# Altium PCB PCB1.PcbDoc
Units mil, origin at the board's own origin, x right, y up, seen from the top; angles counter-clockwise.
Board outline 1653.54 x 1141.73 mil, 2 copper layers (Top Layer, Bottom Layer); 7 components, 7 nets, 58 pads, 80 vias.
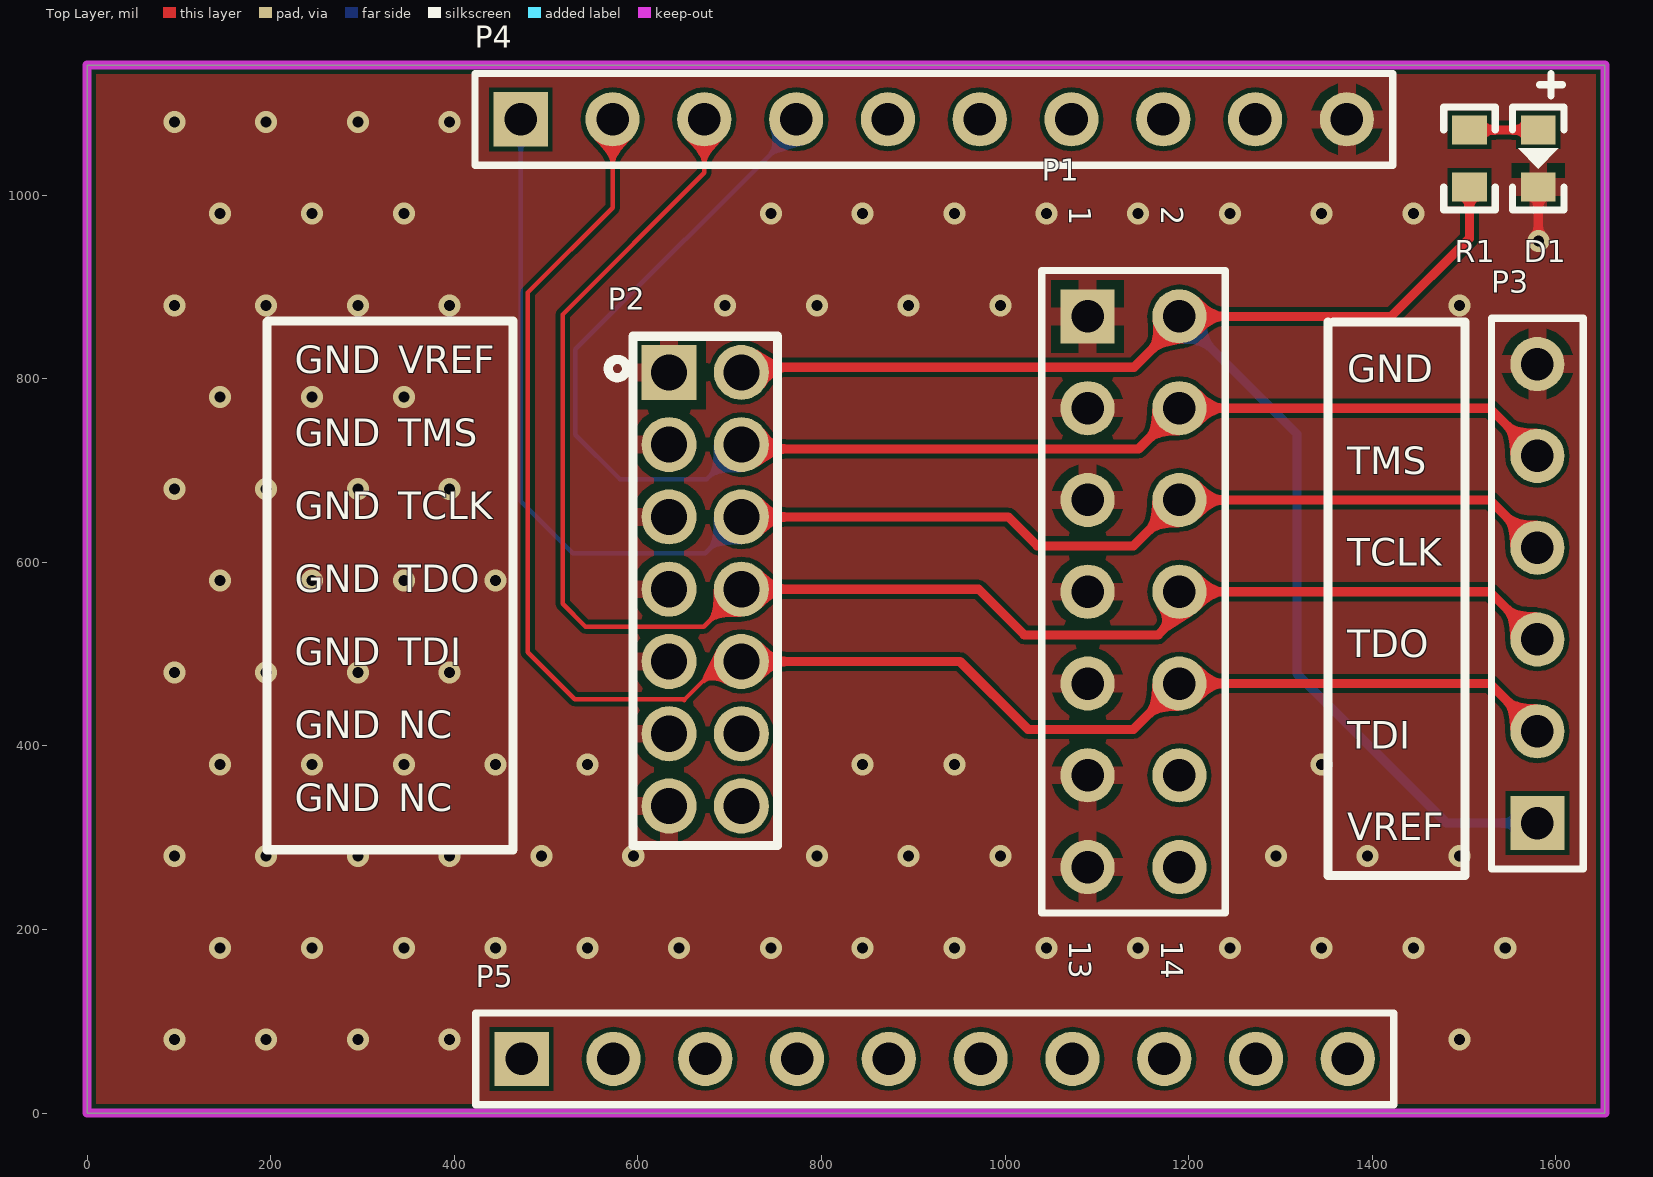
[diagram p0: Top Layer view]
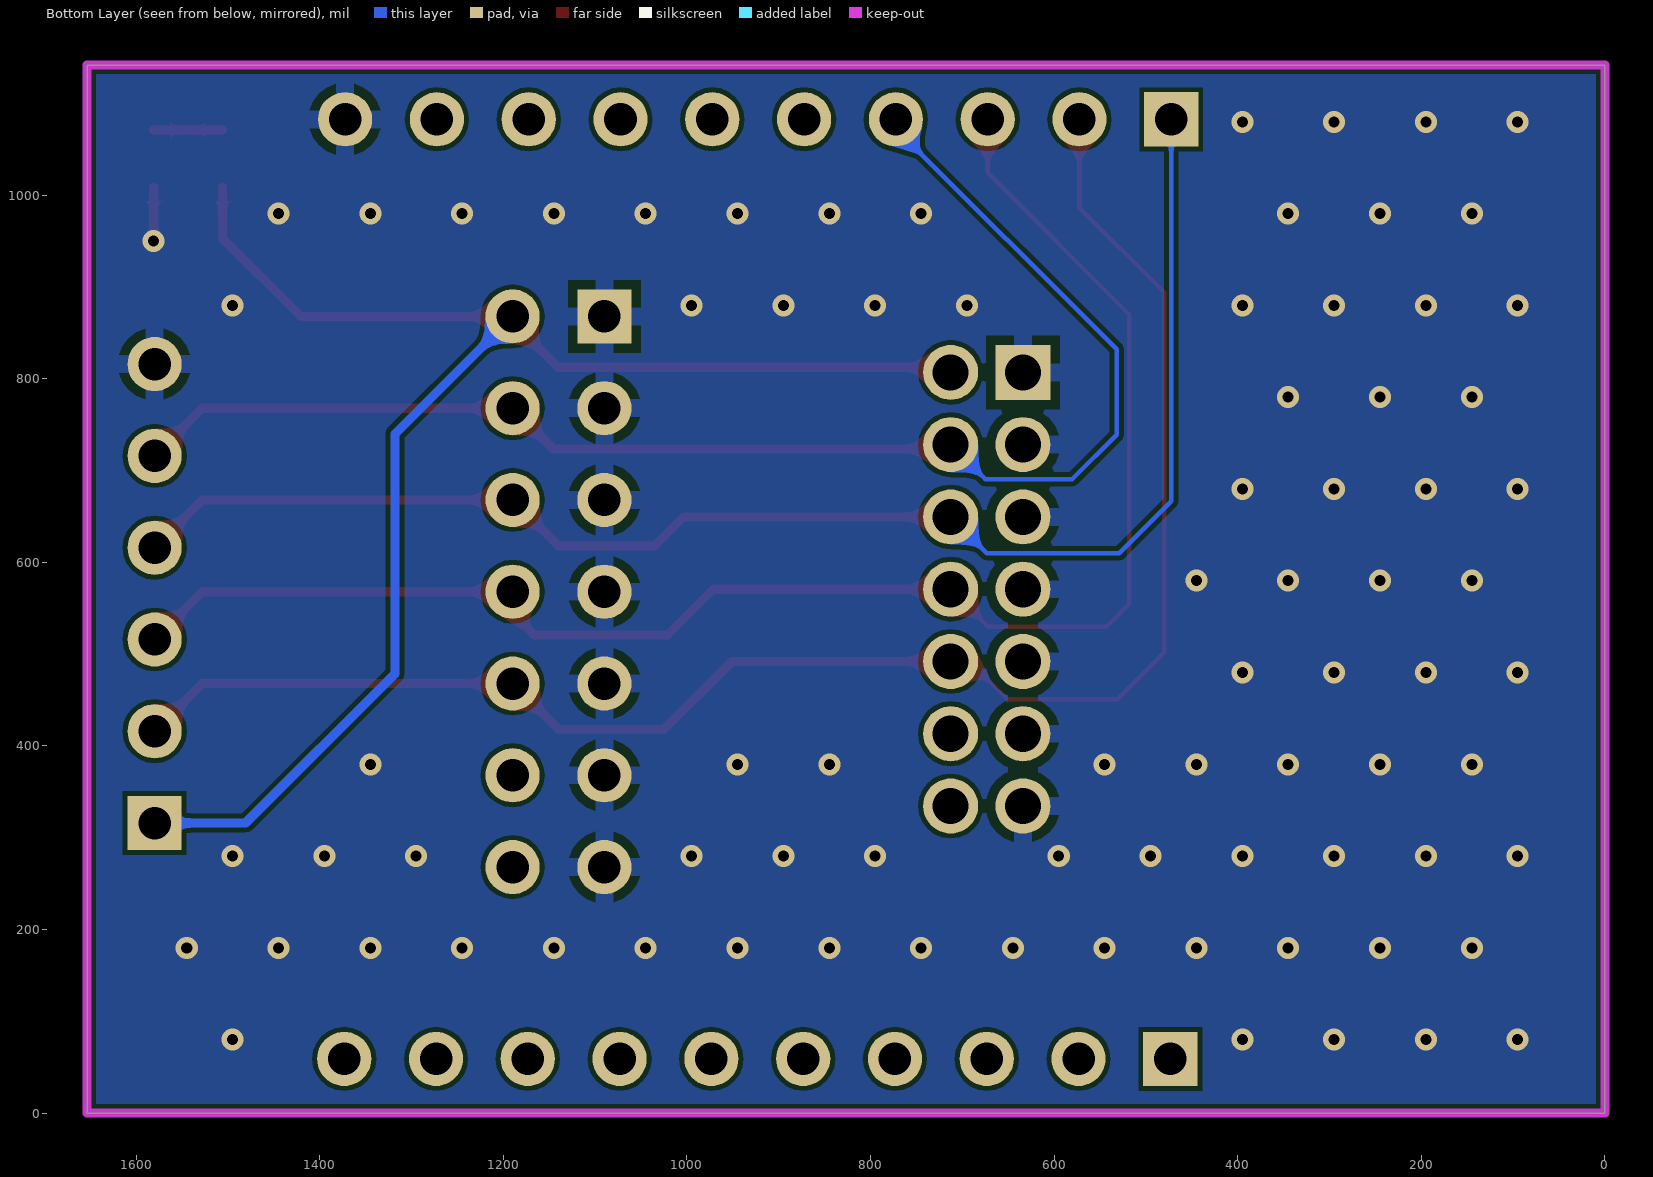
[diagram p1: Bottom Layer view, seen from below]

## Layer stack, top to bottom
Top Solder: solder mask 0.4, Solder Resist, Dk 3.5
Top Layer: signal copper 1.4
Dielectric 1: dielectric 12.6, FR-4, Dk 4.8
Bottom Layer: signal copper 1.4
Bottom Solder: solder mask 0.4, Solder Resist, Dk 3.5

## Board outline
0,0 0,1141.73 1653.54,1141.73 1653.54,0

## Design rules (kind name [scope] priority, off if disabled: settings)
Clearance [All] p1: gap=5
PolygonConnect VIA [IsVia] p1: connectstyle=Direct reliefconductorwidth=10 reliefentries=4 polygonreliefangle="90 Angle" airgapwidth=10
PolygonConnect [All] p2: connectstyle=Relief reliefconductorwidth=20 reliefentries=4 polygonreliefangle="90 Angle" airgapwidth=10
RoutingVias [All] p1: holewidth=28 width=50 viastyle="Through Hole" minholewidth=12 minwidth=24 maxholewidth=12 maxwidth=24
SolderMaskExpansion [All] p1: expansion=4
Width [All] p1: maxlimit=40 minlimit=5 preferedwidth=10
30 further rules are at their usual default settings.

## Components (designator, comment, footprint, x,y, rotation, side; value= is the part's Value field where it differs from the comment)
D1 "LED0" LED_0603 1581,1040 r270 top
P1 "Header 7X2" HDR2X7 1090,868 r270 top
P2 "Header 7X2" HDR-TH_2x7p 634,807 r270 top
P3 "Header 6" HDR1X6 1580,316 r90 top
P4 "Header 10" HDR1X10 472.44,1082.68 r0 top
P5 "Header 10" HDR1X10 473.44,59.06 r0 top
R1 "Res2" R_0603 1506,1040 r90 top

## Footprints (in the part's own frame and the unit in brackets; to place one, negate y for a bottom-side part, rotate by r counter-clockwise, add the part's x,y. Pads: shape width x height; smd on the part's side, far side on the other; paste and mask are expansions set on the pad)
HDR1X6 [mm] "Connector; Header; 6 Position"
  rect 1.5x1.5 hole 0.9: 1(0,0)
  round 1.5 hole 0.9: 2(2.54,0) 3(5.08,0) 4(7.62,0) 5(10.16,0) 6(12.7,0)
  silkscreen extent -1.27,-1.27 13.97,1.27
HDR1X10 [mm] "Connector; Header; 10 Position"
  rect 1.5x1.5 hole 0.9: 1(0,0)
  round 1.5 hole 0.9: 2(2.54,0) 3(5.08,0) 4(7.62,0) 5(10.16,0) 6(12.7,0) 7(15.24,0) 8(17.78,0) 9(20.32,0) 10(22.86,0)
  silkscreen extent -1.27,-1.27 24.13,1.27
HDR2X7 [mm] "Connector; Header; 7x2 Position"
  rect 1.5x1.5 hole 0.9: 1(0,0)
  round 1.5 hole 0.9: 2(0,2.54) 3(2.54,0) 4(2.54,2.54) 5(5.08,0) 6(5.08,2.54) 7(7.62,0) 8(7.62,2.54) 9(10.16,0) 10(10.16,2.54) 11(12.7,0) 12(12.7,2.54) 13(15.24,0) 14(15.24,2.54)
  silkscreen extent -1.27,-1.27 16.51,3.81
HDR-TH_2x7p [mil]
  rect 60x60 hole 39.37: 1(0,0)
  round 60 hole 39.37: 2(0,78.74) 3(78.73,0) 4(78.74,78.74) 5(157.47,0) 6(157.48,78.74) 7(236.22,0) 8(236.22,78.74) 9(314.96,0) 10(314.96,78.74) 11(393.7,0) 12(393.7,78.74) 13(472.44,0) 14(472.44,78.74)
  silkscreen extent -39,-66 516,118
LED_0603 [mm]
  rect 0.8x0.96 smd: 1(-0.79,0) 2(0.79,0)
  silkscreen extent -2.35,-0.71 1.42,0.71
R_0603 [mm]
  rect 0.8x0.96 smd: 1(-0.79,0) 2(0.79,0)
  silkscreen extent -1.42,-0.71 1.42,0.71, body extent -0.76,-0.38 0.76,0.38, height 0.41

## Part data
D1: "Typical INFRARED GaAs LED"
P1 P2: "Header, 7-Pin, Dual row"
P3: "Header, 6-Pin"
P4 P5: "Header, 10-Pin"
R1: "Resistor"

## Via types
v1: diameter 24, hole 12, Top Layer to Bottom Layer, tented both sides, 80 vias

## Nets (pads, with @x,y where several pads share a name; then routed paths per layer and width w, separated by ;. In a path a pad name is that pad's centre, name@x,y a point inside that pad or via, vN(x,y) a via of type N, cw(c..) or ccw(c..) an arc to the next point about the centre after c; other vN are vias at no path point)
FPGA_TCK: P1.6 P2.6 P3.4 P4.1 | length 1618.8
  Top Layer w10: P2.6 1003.48,649.52 1035,618 1140,618 P1.6 1528,668 P3.4
  Bottom Layer w5: P4.1 472.44,666.56 529,610 673.22,610 P2.6
FPGA_TDI: P1.10 P2.10 P3.2 P4.2 | length 1830.8
  Top Layer w5: P4.2 572.44,986.44 480,894 480,502 531.2,450.8 649.53,450.8 650.33,450 692.37,492.04 P2.10
  Top Layer w10: P2.10 950.96,492.04 1025,418 1140,418 P1.10 1528,468 P3.2
FPGA_TDO: P1.8 P2.8 P3.3 P4.3 | length 1756.6
  Top Layer w5: P4.3 672.44,1024.44 518,870 518,555 543,530 671.96,530 P2.8
  Top Layer w10: P2.8 971.22,570.78 1021,521 1167,521 1190,544 P1.8 1528,568 P3.3
FPGA_TMS: P1.4 P2.4 P3.5 P4.4 | length 1571.5
  Top Layer w10: P2.4 712.74,723.47 1145.47,723.47 P1.4 1528,768 P3.5
  Bottom Layer w5: P2.4 675.25,690.77 580.23,690.77 532,739 532,832 772.44,1072.44 P4.4
GND: D1.2 P1.1 P1.3 P1.5 P1.7 P1.9 P1.11 P1.13 P2.1 P2.3 P2.5 P2.7 P2.9 P2.11 P2.13 P3.6 P4.10 | length 58.9
  Top Layer w10: v1(1581,950) D1.2
  other v1: 95,80 195,80 295,80 395,80 1495,80 145,180 245,180 345,180 445,180 545,180 645,180 745,180 845,180 945,180 1045,180 1145,180 1245,180 1345,180 1445,180 1545,180 95,280 195,280 295,280 395,280 495,280 595,280 795,280 895,280 995,280 1295,280 1395,280 1495,280 145,380 245,380 345,380 445,380 545,380 845,380 945,380 1345,380 95,480 195,480 295,480 395,480 145,580 245,580 345,580 445,580 95,680 195,680 295,680 395,680 145,780 245,780 345,780 95,880 195,880 295,880 395,880 695,880 795,880 895,880 995,880 1495,880 145,980 245,980 345,980 745,980 845,980 945,980 1045,980 1145,980 1245,980 1345,980 1445,980 95,1080 195,1080 295,1080 395,1080
NetD1_1: D1.1 R1.2 | length 75
  Top Layer w10: R1.2 D1.1
VREF: P1.2 P2.2 P3.1 R1.1 | length 1687.9
  Top Layer w10: P2.2 712.74,812.53 1140.53,812.53 1190,862 P1.2 1421,868 1506,953 R1.1
  Bottom Layer w10: P1.2 1318,740 1318,479 1481,316 P3.1
pads on no net: P1.12 P1.14 P2.12 P2.14 P4.5 P4.6 P4.7 P4.8 P4.9 P5.1 P5.2 P5.3 P5.4 P5.5 P5.6 P5.7 P5.8 P5.9 P5.10

## Polygon pours and split planes (outlines as drawn)
GND on Top Layer "P20" (solid, remove dead copper, pour order 2): -62,1286 -51,1275 -51,-146 1755,-146 1815,-86 2073,172 2073,1318 733,1318 682,1369
GND on Bottom Layer "P20" (solid, remove dead copper, pour order 4): -104,1254 -97,1247 -97,-96 1820,-96 1847,-123 1759,-35 1759,1318 889,1318 880,1309

## Keep-outs
Keep-Out Layer:
  the board outline again, w10

## Silkscreen, mask and mechanical layers (free items; w line width, h text height)
Top Overlay:
  lines w10: 196,862 196,287 464,287 464,863 197,863 ; 1352,862 1352,259 1501,259 1501,862 1358,862
  text "GND" at 226,806 h30
  text "VREF" at 339,806 h30
  text "GND" at 1373,796 h30
  text "GND" at 226,726.5 h30
  text "TMS" at 339,726.5 h30
  text "TMS" at 1373,696.2 h30
  text "GND" at 226,647 h30
  text "TCLK" at 339,647 h30
  text "TCLK" at 1373,596.4 h30
  text "GND" at 226,567.5 h30
  text "TDO" at 339,567.5 h30
  text "TDO" at 1373,496.6 h30
  text "GND" at 226,488 h30
  text "TDI" at 339,488 h30
  text "GND" at 226,408.5 h30
  text "NC" at 339,408.5 h30
  text "TDI" at 1373,396.8 h30
  text "GND" at 226,329 h30
  text "NC" at 339,329 h30
  text "VREF" at 1373,297 h30

## Text inside footprints (layer, text, board x,y; h text height)
P1: Top Overlay "2" at 1170,988 h24 r270; Top Overlay "1" at 1070,988 h24 r270; Top Overlay "14" at 1170,188 h24 r270; Top Overlay "13" at 1070,188 h24 r270